# Altium PCB PCB.PcbDoc
Units mm, origin at the board's own origin, x right, y up, seen from the top; angles counter-clockwise.
Board outline 42.5 x 60 mm, 2 copper layers (Top Layer, Bottom Layer); 12 components, 12 nets, 52 pads, 0 vias.
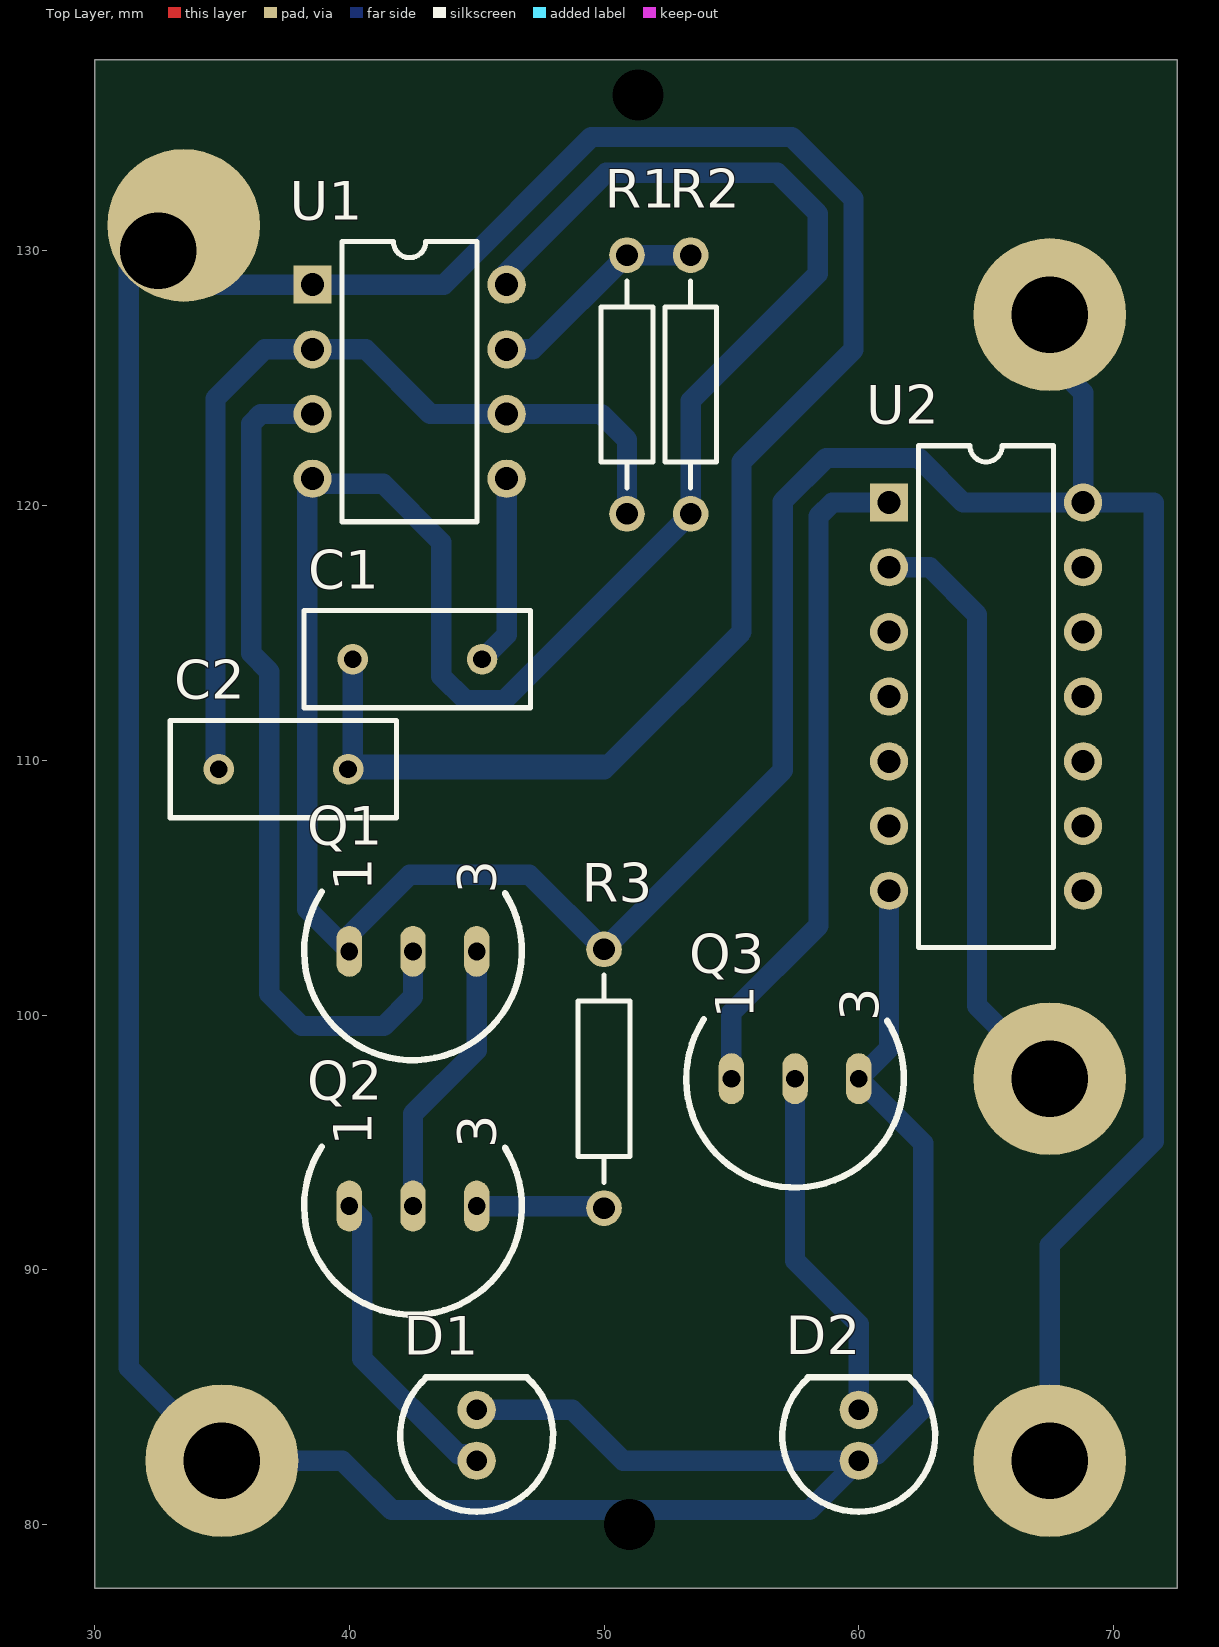
[diagram p0: Top Layer view]
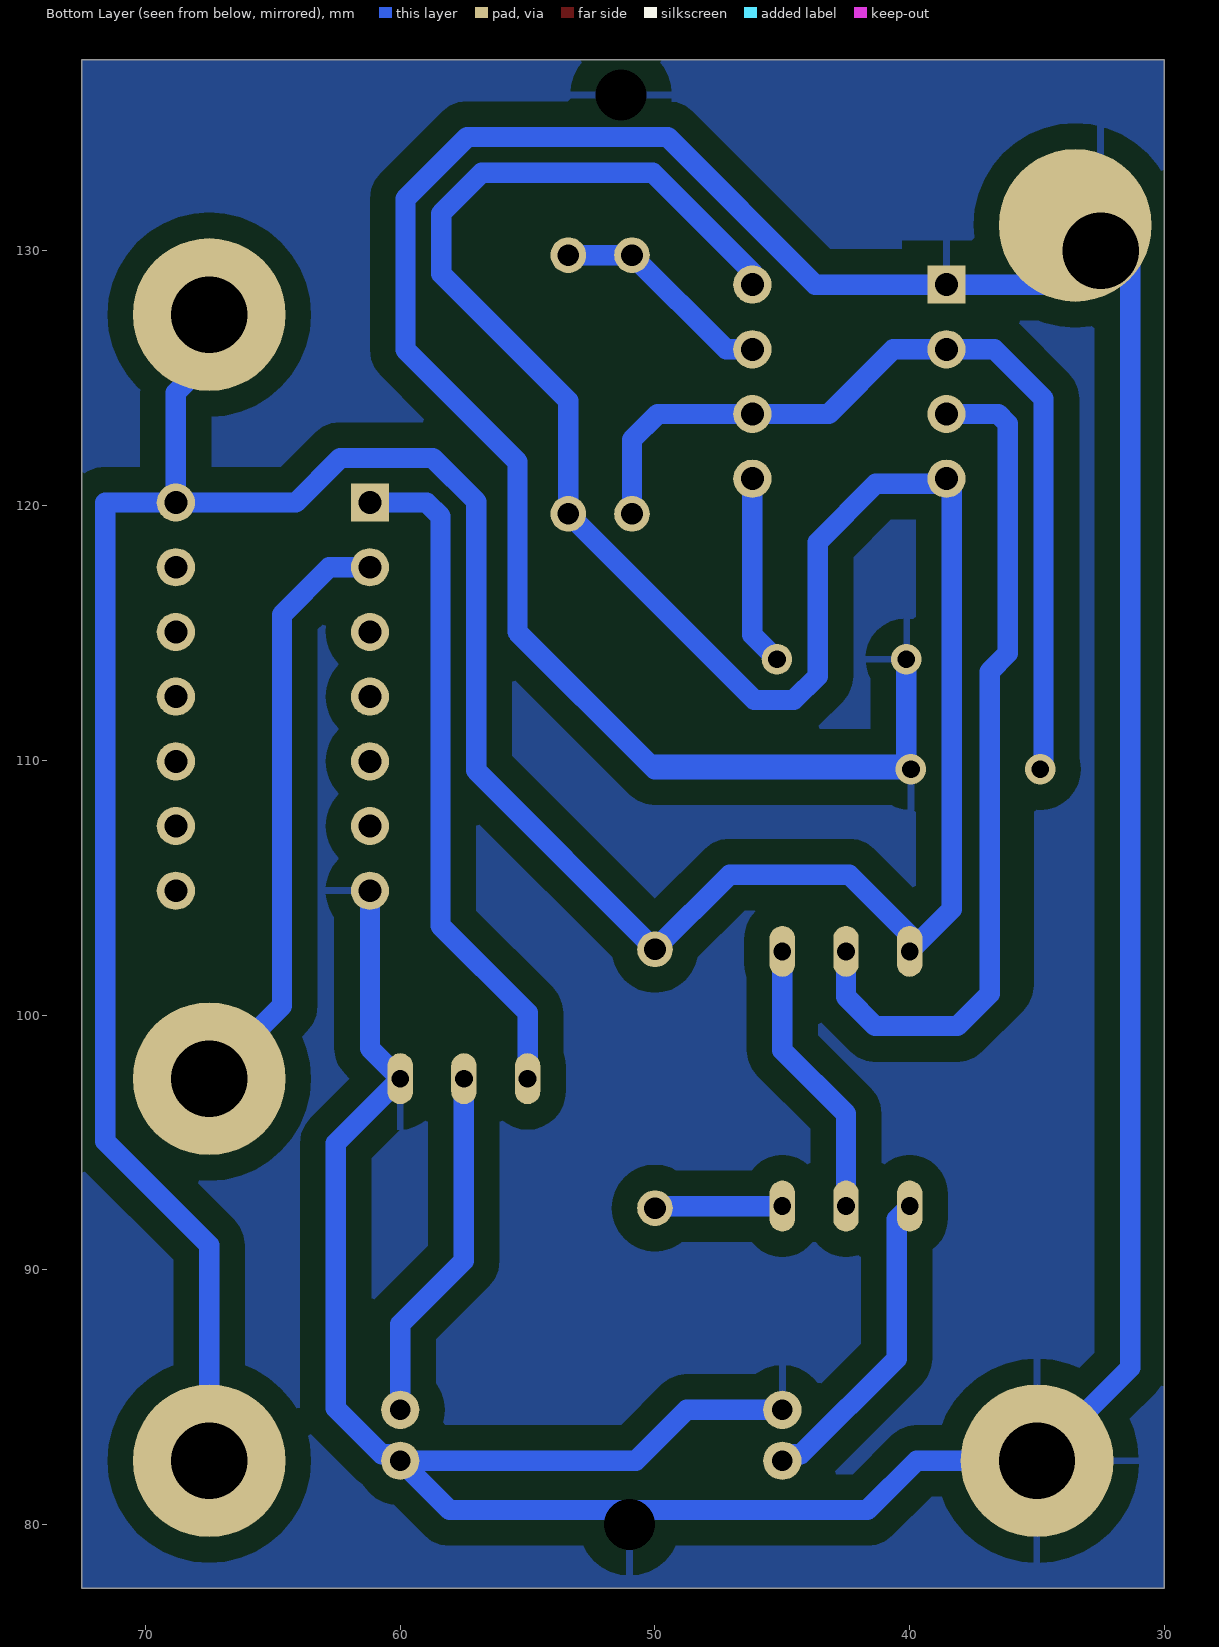
[diagram p1: Bottom Layer view, seen from below]

## Layer stack, top to bottom
Top Layer: signal copper 0.0356
Dielectric: dielectric 0.32, FR-4, Dk 4.8
Bottom Layer: signal copper 0.0356

## Board outline
30,77.5 72.5,77.5 72.5,137.5 30,137.5

## Design rules (kind name [scope] priority, off if disabled: settings)
Clearance Clearance_1 [InNamedPolygon('GND')] p1: gap=1
Clearance [Not HasFootprint('LED')] p2: gap=0.6
PolygonConnect [All] p1: connectstyle=Relief reliefconductorwidth=0.254 reliefentries=4 polygonreliefangle="90 Angle"
RoutingVias [All] p1: holewidth=0.711 width=1.27 viastyle="Through Hole" minholewidth=0.711 minwidth=1.27 maxholewidth=0.711 maxwidth=1.27
SilkscreenOverComponentPads [All] p1: minsilkscreentomaskgap=0.254
SolderMaskExpansion SolderMaskExpansion_1 [HasFootprint('LED')] p1: expansion=0.15
SolderMaskExpansion [Not HasFootprint('LED')] p2: expansion=0.4
Width [All] p1: maxlimit=2 minlimit=0.6 preferedwidth=0.8
27 further rules are at their usual default settings.

## Components (designator, comment, footprint, x,y, rotation, side; value= is the part's Value field where it differs from the comment)
C1 "Cap" RAD-0.2 42.672,113.97 r0 top
C2 "Cap" RAD-0.2 37.414,109.652 r180 top
D1 "LED0" LED 45,82.5 r90 top
D2 "LED0" LED 60,82.5 r90 top
Q1 "BC558" TO-92 42.5,102.5 r90 top
Q2 "BC548" TO-92 42.5,92.5 r90 top
Q3 "BC558" TO-92 57.5,97.5 r90 top
R1 "Res2" AXIAL-0.4 50.903,124.754 r90 top
R2 "Res2" AXIAL-0.4 53.403,124.754 r270 top
R3 "Res2" AXIAL-0.4 50,97.5 r90 top
U1 "NE555P" P008 42.367,124.866 r270 top
U2 "SN74LS04N" N014 65,112.5 r270 top

## Footprints (in the part's own frame and the unit in brackets; to place one, negate y for a bottom-side part, rotate by r counter-clockwise, add the part's x,y. Pads: shape width x height; smd on the part's side, far side on the other; paste and mask are expansions set on the pad)
AXIAL-0.4 [mm] "Axial Device, Thru-Hole; 2 Leads; 0.4 in Pin Spacing"
  round 1.4 hole 0.85: 1(-5.08,0) 2(5.08,0)
  silkscreen extent -4.06,-1.02 4.06,1.02
LED [mm]
  round 1.5 hole 0.8: A(0,0) K(2,0)
  silkscreen extent -2,-3 3.29,3
N014 [mm] "DIP; 14 Leads; Row Spacing 7.62 mm; Pitch 2.54 mm"
  rect 1.5x1.5 hole 0.9: 1(-7.62,-3.81)
  round 1.5 hole 0.9: 2(-5.08,-3.81) 3(-2.54,-3.81) 4(0,-3.81) 5(2.54,-3.81) 6(5.08,-3.81) 7(7.62,-3.81) 8(7.62,3.81) 9(5.08,3.81) 10(2.54,3.81) 11(0,3.81) 12(-2.54,3.81) 13(-5.08,3.81) 14(-7.62,3.81)
  silkscreen extent -9.85,-2.65 9.85,2.65
P008 [mm] "DIP; 8 Leads; Row Spacing 7.62 mm; Pitch 2.54 mm"
  rect 1.5x1.5 hole 0.9: 1(-3.81,-3.81)
  round 1.5 hole 0.9: 2(-1.27,-3.81) 3(1.27,-3.81) 4(3.81,-3.81) 5(3.81,3.81) 6(1.27,3.81) 7(-1.27,3.81) 8(-3.81,3.81)
  silkscreen extent -5.5,-2.65 5.5,2.65
RAD-0.2 [mm] "Radial Cap, Thru-Hole; 2 Leads; 0.2 in Pin Spacing"
  round 1.2 hole 0.7: 1(-2.54,0) 2(2.54,0)
  silkscreen extent -4.44,-1.91 4.44,1.91
TO-92 [mm] "TO, Flat Index; 3 In-Line, Axial Leads; Body Dia. 4.6mm; Leads 0.41 x 0.39 mm (max)"
  oval 2x1 hole 0.7: 1(0,2.5) 2(0,0) 3(0,-2.5)
  silkscreen extent -4.27,-4.27 2.33,4.27

## Part data
C1 C2: "Capacitor"
D1 D2: "Typical INFRARED GaAs LED"
Q1 Q3: "PNP Bipolar Transistor"
Q2: "NPN General Purpose Amplifier"
R1 R2 R3: "Resistor"
U1: "Precision Timer"
U2: "Hex Inverter"

## Free pads (board coordinates)
  round 6 hole 3: 4(67.5,97.5) 6(67.5,127.5) 7(35,82.5) 8(67.5,82.5)
  round 6 hole 3 copper offset 1,1: 5(32.5,130)
  round 1.524 hole 2: 9(51,80) 10(51.333,136.119)

## Nets (pads, with @x,y where several pads share a name; then routed paths per layer and width w, separated by ;. In a path a pad name is that pad's centre, name@x,y a point inside that pad or via, vN(x,y) a via of type N, cw(c..) or ccw(c..) an arc to the next point about the centre after c; other vN are vias at no path point)
DISC: R1.2 R2.1 U1.7 | length 8.8
  Bottom Layer w0.8: U1.7 47.205,126.136 R1.2 R2.1
GND: C1.1 C2.1 D1.K D2.A pad.5 pad.7 pad.9 pad.10 Q3.3 U1.1 U2.7 | length 198.2
  Bottom Layer w0.8: pad.5@31.344,129.565 31.344,86.156 pad.7 39.725,82.5 41.656,80.569 58.069,80.569 D2.A ; pad.5 33.824,128.676 U1.1 43.702,128.676 49.497,134.471 57.374,134.471 59.795,132.05 59.795,126.114 55.397,121.716 55.397,115.036 50.19,109.83 ; C2.1 50.013,109.652 50.19,109.83 ; C1.1 40.132,109.83 50.19,109.83 ; D1.K 48.748,84.5 50.748,82.5 D2.A ; U2.7 61.19,98.69 Q3.3 62.535,94.965 62.535,84.56 60.725,82.75 60.25,82.75 D2.A
NetC1_2: C1.2 U1.5 | length 7.5
  Bottom Layer w0.8: C1.2 46.177,114.935 U1.5
NetC2_2: C2.2 R1.1 U1.2 U1.6 | length 35.9
  Bottom Layer w0.8: C2.2 34.744,109.782 34.744,124.203 36.678,126.136 U1.2 40.64,126.136 43.18,123.596 U1.6 49.886,123.596 50.903,122.579 R1.1
NetD1_1: D1.A Q2.1 | length 12.3
  Bottom Layer w0.8: Q2.1 40.513,91.987 40.513,86.512 44.275,82.75 44.75,82.75 D1.A
NetD2_2: D2.K Q3.2 | length 14
  Bottom Layer w0.8: Q3.2 57.5,90.353 60,87.853 D2.K
NetQ1_2: Q1.2 U1.3 | length 33.7
  Bottom Layer w0.8: U1.3 36.525,123.596 36.144,123.215 36.144,114.198 36.855,113.487 36.855,100.838 38.125,99.568 41.351,99.568 42.5,100.717 Q1.2
NetQ1_3: Q1.3 Q2.2 | length 11
  Bottom Layer w0.8: Q2.2 42.5,96.119 45,98.619 Q1.3
NetQ2_3: Q2.3 R3.1 | length 5
  Bottom Layer w0.8: Q2.3 49.92,92.5 R3.1
NetQ3_1: Q3.1 U2.1 | length 26.5
  Bottom Layer w0.8: Q3.1 55,100.085 58.42,103.505 58.42,119.583 58.957,120.12 U2.1
OUT: pad.4 U2.2 | length 23.6
  Bottom Layer w0.8: U2.2 62.785,117.58 64.643,115.722 64.643,104.064 64.643,100.357 pad.4
VCC: pad.6 pad.8 Q1.1 R2.2 R3.2 U1.4 U1.8 U2.14 | length 169.2
  Bottom Layer w0.8: U1.4 U1.4@38.354,120.853 ; Q1.1 Q1.1@39.678,102.822 ; U1.8 46.177,129.159 50.089,133.071 56.794,133.071 58.395,131.47 58.395,129.108 53.403,124.116 R2.2 46.098,112.37 44.549,112.37 43.612,113.307 43.612,118.567 41.326,120.853 U1.4@38.354,120.853 ; pad.8 67.5,90.97 71.577,95.047 71.577,120.12 U2.14 ; pad.6 67.5,125.743 68.81,124.433 U2.14 ; U1.4@38.354,120.853 38.354,104.146 Q1.1@39.678,102.822 ; Q1.1@39.678,102.822 42.367,105.512 47.068,105.512 R3.2 57.02,109.6 57.02,120.163 58.727,121.87 62.354,121.87 64.104,120.12 U2.14
pads on no net: U2.3 U2.4 U2.5 U2.6 U2.8 U2.9 U2.10 U2.11 U2.12 U2.13

## Polygon pours and split planes (outlines as drawn)
GND on Bottom Layer "GND" (solid, remove dead copper, pour order 7): 30,77.5 72.5,77.5 72.5,137.5 30,137.5

## Text inside footprints (layer, text, board x,y; h text height)
Q1: Top Overlay "1" at 40.874,104.862 h1.5 r90; Top Overlay "3" at 45.777,104.761 h1.5 r90
Q2: Top Overlay "1" at 40.874,94.862 h1.5 r90; Top Overlay "3" at 45.777,94.761 h1.5 r90
Q3: Top Overlay "1" at 55.874,99.862 h1.5 r90; Top Overlay "3" at 60.777,99.761 h1.5 r90